# EAGLE board Schaltplan (EAGLE 9.6.2)
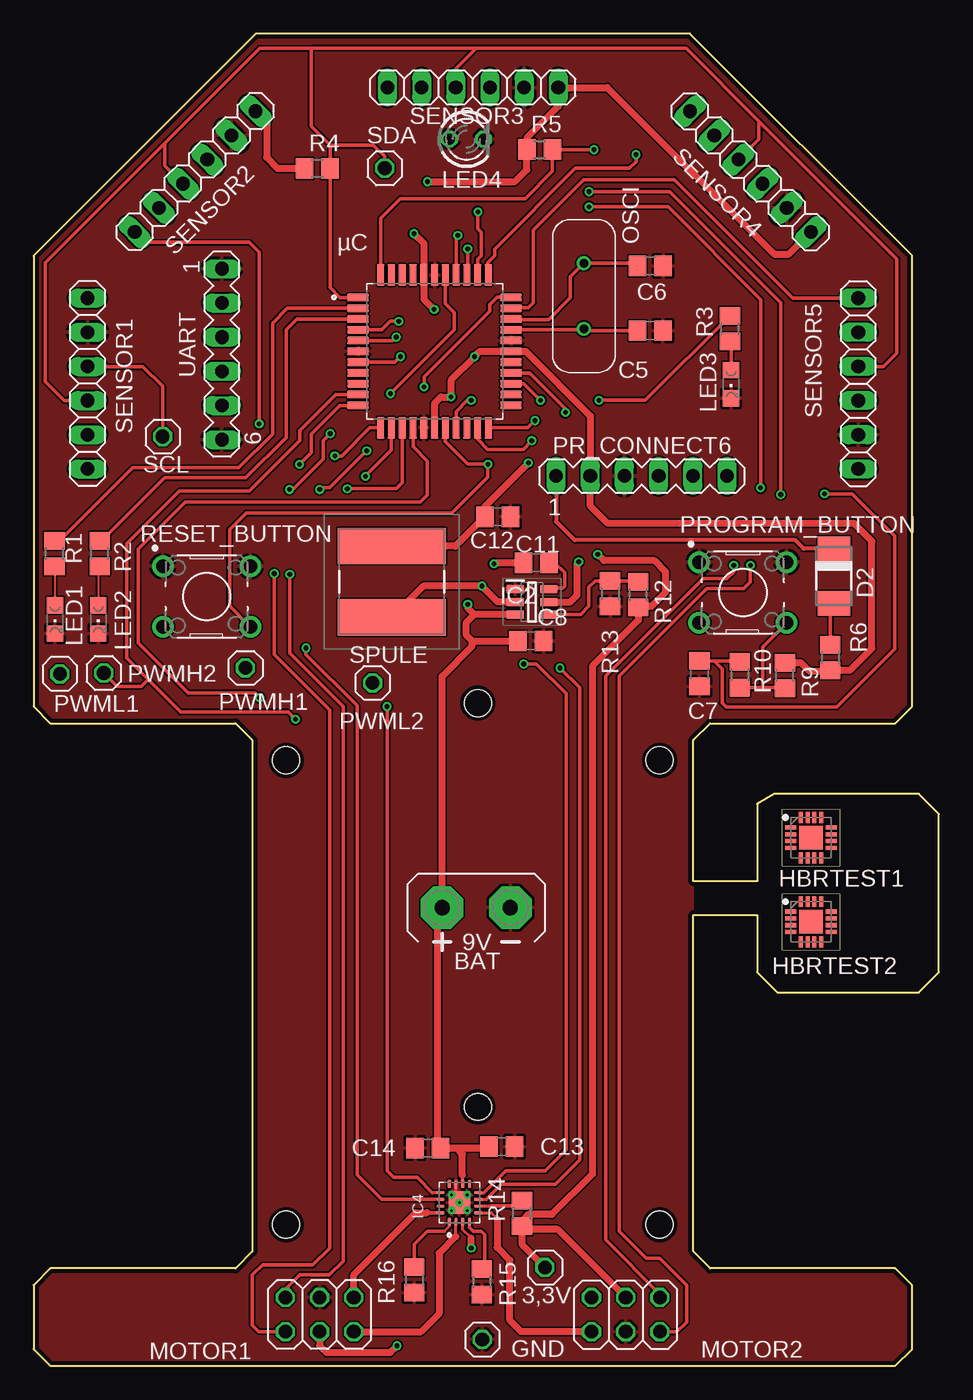
[diagram p0: board, top side]
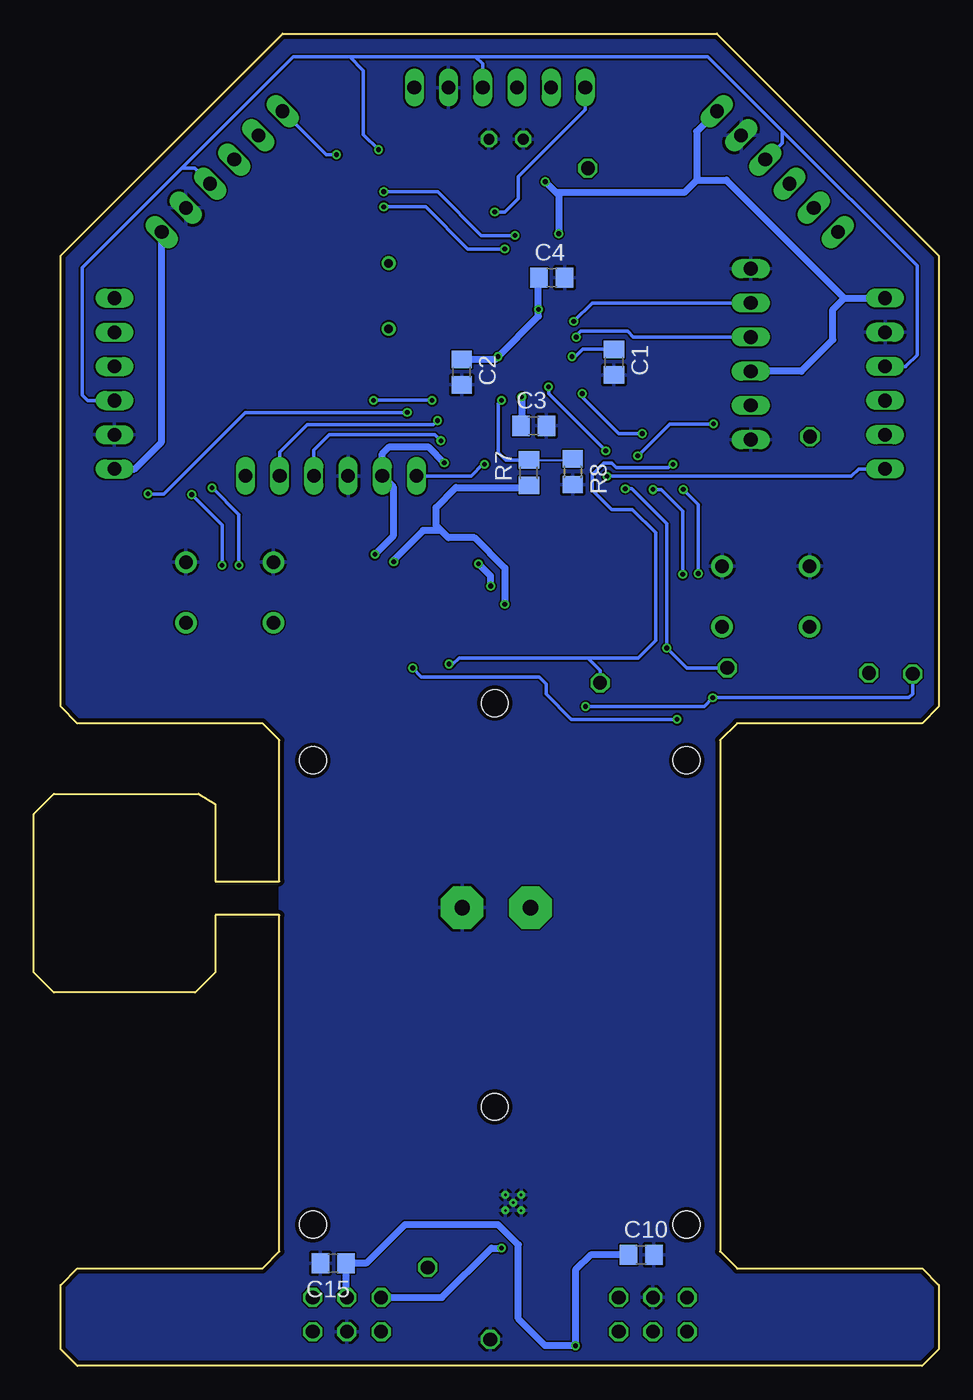
[diagram p1: board, bottom side, seen from below]

Size 67.25 x 99 mm. Coordinates in mm from the lower left corner, seen from the top.
Outline: 16.5,99 0,82.5 0,49 1.25,47.75 15,47.75 16.25,46.5 16.25,8.5 15,7.25 1.25,7.25 0,6 0,1.25 1.25,0 64,0 65.25,1.25 65.25,6 64,7.25 50.25,7.25 49,8.5 49,33.5 53.75,33.5 53.75,29.25 55.25,27.75 65.75,27.75 67.25,29.25 67.25,41 65.75,42.5 55,42.5 53.75,41.75 53.75,36 49,36 49,46.5 50.25,47.75 64,47.75 65.25,49 65.25,82.5 48.75,99 16.5,99
Copper layers (1*16): Top 0.035mm / dielectric 1.5mm / Bottom 0.035mm
Design rules "PCB-POOL Standard": minimum track width 0.125mm, minimum drill 0.2mm, track to track 0.125mm, track to pad 0.125mm, pad to pad 0.125mm, via to via 0.125mm, smd to smd 0.125mm, copper to edge 0.3mm, drill to drill 0.2mm, minimum pad ring 0.2mm, minimum via ring 0.15mm, stop-mask expansion 0.03mm, vias tented up to drill 0mil, thermal gap 0.2mm
Holes 2 mm at 18.75,45 46.5,45 18.75,10.5 46.5,10.5 33,19.25 33,49.25

## Footprints (pad centres in the part's own frame; a part is rotated, then mirrored left to right if it is on the bottom)
1X01 = drill 1.016 octagon: 1 0,0
AB9V = drill 1.118 pad 3.15 octagon: + 0,2.54; - 0,-2.54
C0805 = smd 1.3 x 1.5: 1 -0.95,0; 2 0.95,0
DO-214AC = smd 1.8 x 2.4: A 2.025,0; C -2.025,0
QFN50P300X300X80-17N = smd 0.8 x 0.3: 1 -1.5,0.75; 2 -1.5,0.25; 3 -1.5,-0.25; 4 -1.5,-0.75; 9 1.5,-0.75; 10 1.5,-0.25; 11 1.5,0.25; 12 1.5,0.75 | smd 0.3 x 0.8: 5 -0.75,-1.5; 6 -0.25,-1.5; 7 0.25,-1.5; 8 0.75,-1.5; 13 0.75,1.5; 14 0.25,1.5; 15 -0.25,1.5; 16 -0.75,1.5 | smd 1.75 x 1.75: 17 0,0
SOT95P280X110-6N = smd 1.25 x 0.6: 1 -1.25,0.95; 2 -1.25,0; 3 -1.25,-0.95; 4 1.25,-0.95; 5 1.25,0; 6 1.25,0.95
QFN50P300X300X80-17N' = smd 0.6 x 0.24: 1 -1.4,0.75; 2 -1.4,0.25; 3 -1.4,-0.25; 4 -1.4,-0.75; 9 1.4,-0.75; 10 1.4,-0.25; 11 1.4,0.25; 12 1.4,0.75 | smd 0.24 x 0.6: 5 -0.75,-1.4; 6 -0.25,-1.4; 7 0.25,-1.4; 8 0.75,-1.4; 13 0.75,1.4; 14 0.25,1.4; 15 -0.25,1.4; 16 -0.75,1.4 | smd 1.68 x 1.68: 17 0,0 | drill 0.2 pad 0.3: 18 -0.58,0.58; 19 0.58,0.58; 20 0,0; 21 -0.58,-0.58; 22 0.58,-0.58
CHIPLED_0805 = smd 1.2 x 1.2: A 0,-1.05; C 0,1.05
LED3MM = drill 0.813 octagon: A -1.27,0; K 1.27,0
2X03 = drill 1.016 octagon: 1 -2.54,-1.27; 2 -2.54,1.27; 3 0,-1.27; 4 0,1.27; 5 2.54,-1.27; 6 2.54,1.27
XTAL_ECS-160-20-4X-B-DN = drill 0.63 pad 1.03: 1 -2.44,0; 2 2.44,0
MA06-1 = drill 1.016 long: 1 -6.35,0; 2 -3.81,0; 3 -1.27,0; 4 1.27,0; 5 3.81,0; 6 6.35,0
SW_B3F-1000 = drill 1 pad 1.6: 1 -3.25,2.25; 2 3.25,2.25; 3 -3.25,-2.25; 4 3.25,-2.25
R0805 = smd 1.3 x 1.5: 1 -0.95,0; 2 0.95,0
1X06 = drill 1.016 long: 1 -6.35,0; 2 -3.81,0; 3 -1.27,0; 4 1.27,0; 5 3.81,0; 6 6.35,0
SDR08056R8ML = smd 8 x 2.7: 1 0,-2.65; 2 0,2.65
QFP80P1200X1200X120-44N = smd 1.6 x 0.55: 1 -5.68,4; 2 -5.68,3.2; 3 -5.68,2.4; 4 -5.68,1.6; 5 -5.68,0.8; 6 -5.68,0; 7 -5.68,-0.8; 8 -5.68,-1.6; 9 -5.68,-2.4; 10 -5.68,-3.2; 11 -5.68,-4; 23 5.68,-4; 24 5.68,-3.2; 25 5.68,-2.4; 26 5.68,-1.6; 27 5.68,-0.8; 28 5.68,0; 29 5.68,0.8; 30 5.68,1.6; 31 5.68,2.4; 32 5.68,3.2; 33 5.68,4 | smd 0.55 x 1.6: 12 -4,-5.68; 13 -3.2,-5.68; 14 -2.4,-5.68; 15 -1.6,-5.68; 16 -0.8,-5.68; 17 0,-5.68; 18 0.8,-5.68; 19 1.6,-5.68; 20 2.4,-5.68; 21 3.2,-5.68; 22 4,-5.68; 34 4,5.68; 35 3.2,5.68; 36 2.4,5.68; 37 1.6,5.68; 38 0.8,5.68; 39 0,5.68; 40 -0.8,5.68; 41 -1.6,5.68; 42 -2.4,5.68; 43 -3.2,5.68; 44 -4,5.68

## Placement (x,y rotation side)
3,3V  [1X01]  37.98,7.31 0 top
BAT  AB9V  [AB9V]  32.88,34.05 90 top
C1  10μ  [C0805]  24.14,74.59 270 bottom
C2  0,1 μF  [C0805]  35.46,73.86 270 bottom
C3  0,1 μF  [C0805]  30.11,69.86 0 bottom
C4  0,1 μF  [C0805]  28.76,80.86 0 bottom
C5  15pf  [C0805]  45.8,76.94 180 top
C6  15pf  [C0805]  45.8,81.73 180 top
C7  1 µF  [C0805]  49.46,51.44 270 top
C8  2.2 µF  [C0805]  36.94,53.88 0 top
C10  100 nF  [C0805]  22.12,8.25 0 bottom
C11  0,1 µF  [C0805]  37.32,59.67 0 top
C12  44 µF  [C0805]  34.47,63.1 0 top
C13  10 µF  [C0805]  34.78,16.29 0 top
C14  100 nF  [C0805]  29.28,16.19 0 top
C15  100 nF  [C0805]  45,7.62 180 bottom
D2  [DO-214AC]  59.45,58.7 270 top
GND  [1X01]  33.33,1.96 0 top
HBRTEST1  DRV8411RTER  [QFN50P300X300X80-17N]  57.75,39.25 0 top
HBRTEST2  DRV8411RTER  [QFN50P300X300X80-17N]  57.75,33 0 top
IC2  LMR51420XDDCR  [SOT95P280X110-6N]  37.02,56.77 0 top
IC4  DRV8411RTER  [QFN50P300X300X80-17N']  31.62,12.13 90 top
LED1  [CHIPLED_0805]  1.58,55.48 180 top
LED2  [CHIPLED_0805]  4.8,55.48 180 top
LED3  [CHIPLED_0805]  51.81,72.95 180 top
LED4  TLLR4400  [LED3MM]  32.16,91.17 0 top
MOTOR1  [2X03]  21.24,3.81 180 top
MOTOR2  [2X03]  43.98,3.81 0 top
OSCI  ECS-160-20-4X-B-DN  [XTAL_ECS-160-20-4X-B-DN]  40.88,79.5 90 top
PR_CONNECT  [MA06-1]  45.16,66.13 0 top
PROGRAM_BUTTON  B3F-1000  [SW_B3F-1000]  52.69,57.47 0 top
PWMH1  [1X01]  15.73,51.87 0 top
PWMH2  [1X01]  5.2,51.49 0 top
PWML1  [1X01]  1.95,51.42 0 top
PWML2  [1X01]  25.17,50.76 0 top
R1  680 Ω  [R0805]  1.55,60.38 90 top
R2  680 Ω  [R0805]  4.9,60.38 90 top
R3  680 Ω  [R0805]  51.72,77.08 90 top
R4  10 kΩ  [R0805]  21.08,88.99 0 top
R5  10 kΩ  [R0805]  37.58,90.39 0 top
R6  10 kΩ  [R0805]  59.18,52.64 270 top
R7  20 kΩ  [R0805]  30.46,66.37 90 bottom
R8  10 kΩ  [R0805]  27.21,66.44 270 bottom
R9  10 kΩ  [R0805]  55.81,51.31 90 top
R10  1kΩ  [R0805]  52.46,51.36 270 top
R12  100 kΩ  [R0805]  44.92,57.31 90 top
R13  22,1 kΩ  [R0805]  42.82,57.38 270 top
R14  10 kΩ  [R0805]  36.28,11.34 90 top
R15  1 Ω  [R0805]  33.28,6.24 270 top
R16  1 Ω  [R0805]  28.28,6.39 270 top
RESET_BUTTON  B3F-1000  [SW_B3F-1000]  12.86,57.17 0 top
SCL  [1X01]  9.58,69.05 0 top
SDA  [1X01]  26.08,89 0 top
SENSOR1  [1X06]  4,73 270 top
SENSOR2  [1X06]  12,88.75 225 top
SENSOR3  [1X06]  32.62,95 180 top
SENSOR4  [1X06]  53.25,88.75 135 top
SENSOR5  [1X06]  61.25,73 90 top
SPULE  SDR0805-6R8ML  [SDR08056R8ML]  26.6,58.27 0 top
UART  [MA06-1]  13.98,75.18 270 top
µC  DSPIC33FJ64MC804-I/PT  [QFP80P1200X1200X120-44N]  29.78,75.39 0 top

## Library data of the parts
3,3V GND MOTOR1 MOTOR2 PWMH1 PWMH2 PWML1 PWML2 SCL SDA SENSOR1-SENSOR5 = pinhead
BAT = battery
C1-C8 C10-C15 = rcl; SPICEPREFIX: C
D2 = diode
HBRTEST1 HBRTEST2 = ohne thermal; DESCRIPTION: Motor / Motion / Ignition Controllers & Drivers 1.65-V to 11-V, 4-A, dual H-bridge motor driver with current regulation; HEIGHT: 0.8mm; MANUFACTURER_NAME: Texas Instruments; MANUFACTURER_PART_NUMBER: DRV8411RTER
IC2 = LMR51420XDDCR; ARROW_PART_NUMBER: LMR51420XDDCR; ARROW_PRICE-STOCK: https://www.arrow.com/en/products/lmr51420xddcr/texas-instruments?region=nac; DESCRIPTION: Switching Voltage Regulators SIMPLE SWITCHER power converter 4.5-V to 36-V, 2-A, synchronous buck with 40-uA IQ; HEIGHT: 1.1mm; MANUFACTURER_NAME: Texas Instruments; MANUFACTURER_PART_NUMBER: LMR51420XDDCR; MOUSER_PART_NUMBER: 595-LMR51420XDDCR; MOUSER_PRICE-STOCK: https://www.mouser.co.uk/ProductDetail/Texas-Instruments/LMR51420XDDCR?qs=vvQtp7zwQdN6fBqQU4azxw%3D%3D
IC4 = DRV8411RTER; DESCRIPTION: Motor / Motion / Ignition Controllers & Drivers 1.65-V to 11-V, 4-A, dual H-bridge motor driver with current regulation; HEIGHT: 0.8mm; MANUFACTURER_NAME: Texas Instruments; MANUFACTURER_PART_NUMBER: DRV8411RTER
LED1-LED3 = led
LED4 = led; MF: VISHAY SEMICONDUCTOR; OC_FARNELL: 1612437
OSCI = ECS-160-20-4X-B-DN; AVAILABILITY: In Stock; DESCRIPTION: 16 MHz ±30ppm Crystal 20pF 40 Ohms HC-49/US; MF: ECS Inc.; MP: ECS-160-20-4X-B-DN; PACKAGE: HC-49US ECS Inc.; PRICE: None; PURCHASE-URL: https://pricing.snapeda.com/search/part/ECS-160-20-4X-B-DN/?ref=eda
PR_CONNECT UART = con-lstb; OC_FARNELL: unknown; OC_NEWARK: unknown
PROGRAM_BUTTON RESET_BUTTON = B3F-1000; AVAILABILITY: In Stock; DESCRIPTION: Tactile Switch SPST-NO Top Actuated Through Hole; MF: Omron; MP: B3F-1000; PACKAGE: None; PRICE: None; PURCHASE-URL: https://pricing.snapeda.com/search/part/B3F-1000/?ref=eda
R1-R10 R12-R16 = rcl; SPICEPREFIX: R
SPULE = SDR0805-6R8ML; DESCRIPTION: Bourns SDR0805 Series Wire-wound SMD Inductor with a Ferrite Core, 6.8 uH +/-20% 4.1A Idc Q:30; HEIGHT: 5.3mm; MANUFACTURER_NAME: Bourns; MANUFACTURER_PART_NUMBER: SDR0805-6R8ML; MOUSER_PART_NUMBER: 652-SDR0805-6R8ML; MOUSER_PRICE-STOCK: https://www.mouser.co.uk/ProductDetail/Bourns/SDR0805-6R8ML?qs=uD%2FoUDWqfvRMWomOplYMJg%3D%3D
µC = DSPIC33FJ64MC804-I_PT; AVAILABILITY: In Stock; DESCRIPTION: dsPIC dsPIC™ 33F Microcontroller IC 16-Bit 40 MIPs 64KB (64K x 8) FLASH 44-TQFP (10x10); MF: Microchip; MP: DSPIC33FJ64MC804-I/PT; PACKAGE: TQFP-44 Microchip; PRICE: None; PURCHASE-URL: https://pricing.snapeda.com/search/part/DSPIC33FJ64MC804-I/PT/?ref=eda

## Nets
3,3V: 3,3V.1 C2.1 C3.1 C4.1 C10.1 C12.1 C15.1 MOTOR1.4 MOTOR2.4 PR_CONNECT.2 R4.1 R5.1 R6.2 R9.2 R12.1 R14.1 SENSOR1.1 SENSOR2.1 SENSOR3.1 SENSOR4.1 SENSOR5.1 SPULE.2 UART.4 µC.17 µC.28 µC.40
9V: BAT.+ C8.1 C13.1 C14.2 IC2.3 IC2.5 IC4.10 R7.1
CRY1: C5.2 OSCI.1 µC.30
CRY2: C6.2 OSCI.2 µC.31
GND: BAT.- C1.2 C2.2 C3.2 C4.2 C5.1 C6.1 C7.2 C8.2 C10.2 C12.2 C13.2 C14.1 C15.2 GND.1 IC2.1 IC4.11 IC4.17 IC4.18 IC4.19 IC4.20 IC4.21 IC4.22 LED1.C LED2.C LED3.C LED4.A LED4.K MOTOR1.3 MOTOR2.3 PR_CONNECT.3 PROGRAM_BUTTON.1 PROGRAM_BUTTON.2 R8.2 R13.2 R15.2 R16.2 RESET_BUTTON.1 RESET_BUTTON.2 SENSOR1.2 SENSOR2.2 SENSOR3.2 SENSOR4.2 SENSOR5.2 UART.1 UART.6 µC.6 µC.16 µC.29 µC.39
GPIO0_1: SENSOR1.6 µC.13
GPIO0_2: SENSOR2.6 µC.12
GPIO0_3: SENSOR3.6 µC.35
GPIO0_4: SENSOR4.6 µC.34
GPIO0_5: SENSOR5.6 µC.32
KANAL1_A: MOTOR2.6 µC.36
KANAL1_B: MOTOR2.5 µC.37
KANAL2_A: MOTOR1.6 µC.38
KANAL2_B: MOTOR1.5 µC.33
LED1: R1.2 µC.2
LED2: R2.2 µC.3
LED3: R3.2 µC.25
M1+: IC4.2 MOTOR1.2
M1-: IC4.16 MOTOR1.1
M2+: IC4.3 MOTOR2.2
M2-: IC4.5 MOTOR2.1
MCLR: D2.C PR_CONNECT.1 RESET_BUTTON.4 µC.18
N$1: C1.1 µC.7
N$2: PROGRAM_BUTTON.4 R9.1 R10.2
N$3: LED2.A R2.1
N$4: LED1.A R1.1
N$5: C11.2 IC2.6
N$7: PR_CONNECT.6
N$8: LED3.A R3.1
N$10: D2.A R6.1
N$11: C11.1 IC2.2 SPULE.1
N$12: IC4.6 R14.2
N$13: IC2.4 R12.2 R13.1
N$14: IC4.1 R16.1
N$16: IC4.4 R15.1
PGC1: PR_CONNECT.5 µC.22
PGD1: PR_CONNECT.4 µC.21
PWMH1: IC4.14 PWMH1.1 µC.14
PWMH2: IC4.7 PWMH2.1 µC.10
PWML1: IC4.13 PWML1.1 µC.15
PWML2: IC4.8 PWML2.1 µC.11
SCL: R5.2 SCL.1 SENSOR1.3 SENSOR2.3 SENSOR3.3 SENSOR4.3 SENSOR5.3 µC.44
SDA: R4.2 SDA.1 SENSOR1.4 SENSOR2.4 SENSOR3.4 SENSOR4.4 SENSOR5.4 µC.1
SW1: C7.1 R10.1 µC.26
UART_RX: UART.2 µC.4
UART_TX: UART.3 µC.5
VREF: R7.2 R8.1 µC.19

## Tracks (layer width: path | path; a pad name or v marks a point on that pad's centre or on a via)
3,3V  (via drill 0.35)
  Top 0.254: R14.1 36.28,10.25 | 20,88.99 R4.1
  Top 0.508: 36.28,10.25 36.31,10.28 36.31,8.98 3,3V.1 | µC.17 29.78,71.53 30.25,72 v31,72 31,73.25 v32.75,75 33.14,75.39 µC.28 36.54,75.39 41.35,70.58 PR_CONNECT.2 41.35,63.9 42.65,62.6 60.95,62.6 62.26,61.29 62.26,53.31 60.64,51.69 R6.2 59.14,51.65 57.6,51.65 56.99,52.26 R9.2 | v29.75,78.5 28.98,79.27 µC.40 28.98,83.41 v28.25,84.14 | SENSOR4.1 56.11,82.62 55,82.62 42.62,95 SENSOR3.1 38.98,93.59 36.63,91.25 R5.1 36.63,88.88 35.75,88 v29.25,88 | SENSOR2.1 17.3,92.43 17.3,89.8 18.11,88.99 20,88.99 | v41.9,60.3 42.37,59.83 46.12,59.83 46.95,59 46.95,57.5 45.9,56.45 45.01,56.45 R12.1 44.92,55.42 41.5,52 41.5,14.25 38.5,11.25 36.75,11.25 36.28,10.78 R14.1 36.53,10.14 38.92,10.14 MOTOR2.4 | SPULE.2 31.34,60.92 C12.1 33.52,63.87 v36.75,67.1 | MOTOR1.4 21.25,1.5 21.75,1 26.5,1 v27,1.5
  Bottom 0.152: 31,69.92 C3.1
  Bottom 0.508: C2.1 32.94,74.81 v32.75,75 29.75,78 v29.75,78.5 29.75,80.82 C4.1 | SENSOR5.1 59.75,66.65 57.74,68.66 SENSOR4.1 | v28.25,84.14 28.25,87 v29.25,88 28.44,87.19 18.94,87.19 18,88.12 | SENSOR2.1 18,91.73 18,88.12 | 7.02,79.35 7.88,78.5 7.88,76.25 10.21,73.91 UART.4 | 7.02,79.35 SENSOR1.1 | 18,88.12 15.8,88.12 7.02,79.35 | v31,72 31,69.92 | C10.1 25.88,8.25 27,7.12 v27,1.5 29.25,1.5 31.25,3.5 31.25,9 32.75,10.5 39.67,10.5 42.55,7.62 C15.1 44.05,5.15 MOTOR2.4 | v41.9,60.3 40.55,61.65 40.55,65.33 PR_CONNECT.2 41.35,67.78 40.83,68.3 37.95,68.3 v36.75,67.1
9V  (via drill 0.35)
  Top 0.152: 33.73,16.19 C13.1 | C14.2 29.98,16.44
  Top 0.24: IC4.10 31.87,14
  Top 0.254: 31.87,14 31.87,14.13 31.84,14.16
  Top 0.508: C14.2 31.38,16.19 | 29.98,16.44 29.98,33.69 BAT.+ 30.34,51.24 32.58,53.48 32.58,53.88 | 31.38,16.19 33.73,16.19 | 31.38,16.19 31.84,15.73 31.84,14.16 | v32.25,56.6 32.25,56.3 32.73,55.83 | IC2.5 39.88,56.77 40.35,57.25 40.35,59.6 v40.5,59.75 | IC2.3 32.73,55.83 | 32.73,55.83 32.1,55.2 32.1,54.35 32.58,53.88 | 32.58,53.88 C8.1
  Bottom 0.508: v32.25,56.6 32.25,59.3 34.5,61.55 36.45,61.55 36.98,62.08 | 36.98,62.08 37.35,62.45 37.35,63.8 35.88,65.27 30.61,65.27 R7.1 | 36.98,62.08 38.33,62.08 40.5,59.9 v40.5,59.75
CRY1
  Top 0.254: C5.2 40.99,76.94 OSCI.1 40.8,76.99 µC.30
CRY2
  Top 0.254: µC.31 35.5,77.79 35.54,77.75 38.25,77.75 39.88,79.38 39.88,80.94 OSCI.2 44.65,81.94 C6.2
GND
  Top 0.254: IC4.11 31.37,13.04 IC4.19
  pour Top: 16.5,99 0,82.5 0,49 1.25,47.75 15,47.75 16.25,46.5 16.25,8.5 15,7.25 1.25,7.25 0,6 0,1.25 1.25,0 64,0 65.25,1.25 65.25,6 64,7.25 50.25,7.25 49,8.5 49,46.5 50.25,47.75 64,47.75 65.25,49 65.25,82.5 48.75,99
  pour Bottom: 15,47.75 1.25,47.75 0,49 0,82.5 16.5,99 48.75,99 65.25,82.5 65.25,49 64,47.75 50.25,47.75 49,46.5 49,8.5 50.25,7.25 64,7.25 65.25,6 65.25,1.25 64,0 1.25,0 0,1.25 0,6 1.25,7.25 15,7.25 16.25,8.5 16.25,46.5
GPIO0_1  (via drill 0.35)
  Top 0.254: v24.65,66.1 24.65,66.15 26.56,68.06 26.56,69.69 µC.13
  Bottom 0.254: SENSOR1.6 5.95,66.65 6.5,66.1 v24.65,66.1
GPIO0_2  (via drill 0.35)
  Top 0.254: SENSOR2.6 8.27,83.5 16,83.5 16.75,82.75 v16.75,70 | v22.38,67.62 22.88,67.62 24.96,69.71 µC.12
  Bottom 0.254: v22.38,67.62 20,70 v16.75,70
GPIO0_3  (via drill 0.35)
  Top 0.254: v33,85.75 33,84.5 33.25,84.25 33.25,83.02 33.25,82.52 32.98,82.25 µC.35
  Bottom 0.254: SENSOR3.6 26.27,93.35 31.25,88.38 31.25,86.75 32.25,85.75 v33,85.75
GPIO0_4  (via drill 0.35)
  Top 0.254: v44.75,90 44.75,89.5 44.25,89 40.25,89 34.25,83 34.25,82.5 33.75,82 33.75,81.1 µC.34
  Bottom 0.254: SENSOR4.6 45.52,90 v44.75,90
GPIO0_5
  Top 0.254: µC.32 35.49,78.62 36.75,78.62 37.12,79 37.12,84.4 40.88,88.15 47.6,88.15 56.4,79.35 SENSOR5.6
KANAL1_A  (via drill 0.35)
  Top 0.254: MOTOR2.6 46.52,5.33 42.5,9.35 42.5,51.25 49.75,58.5 51.5,58.5 52,59 v52,59.5 | v54,65.25 54,79.25 47.12,86.13 v41.25,86.13 | v32.25,83 32.25,81.14 µC.36
  Bottom 0.254: v52,59.5 52,63.25 v54,65.25 | v41.25,86.13 38.13,86.13 35,83 v32.25,83
KANAL1_B  (via drill 0.35)
  Top 0.254: MOTOR2.5 47.79,2.54 48.5,3.25 48.5,6 46.5,8 45.5,8 43.5,10 43.5,51.25 50,57.75 52.75,57.75 53.25,58.25 v53.25,59.5 | v55.5,64.75 55.5,79 47.25,87.25 v41.25,87.25 | v31.5,84 31.38,83.88 µC.37
  Bottom 0.254: v53.25,59.5 53.25,62.5 v55.5,64.75 | v41.25,87.25 37.25,87.25 34,84 v31.5,84
KANAL2_A  (via drill 0.35)
  Top 0.254: MOTOR1.6 16.71,2.54 16.25,3 16.25,6.75 17,7.5 20.75,7.5 22,8.75 22,48.75 17.87,52.88 v17.87,58.87 | v19,65.13 19.25,65.13 21.5,67.38 21.5,68.75 v22.03,69.28 | v26.5,72.25 31.25,77 31.25,78.25 30.58,78.92 µC.38
  Bottom 0.254: v17.87,58.87 17.87,64 v19,65.13 | v22.03,69.28 23.78,69.28 26.5,72 v26.5,72.25
KANAL2_B  (via drill 0.35)
  Top 0.254: v19.02,58.82 19.02,52.98 23,49 23,7.78 21.97,6.75 19.75,6.75 18.7,5.71 MOTOR1.5 | µC.33 35.42,79.42 34.42,79.42 33.88,78.88 33.88,78.38 29,73.5 v29,72.75 | v21.25,65.13 21.37,65.25 22,65.25 v24.75,68
  Bottom 0.254: v29,72.75 29,72.25 v24.75,68 | v19.02,58.82 19.02,63.52 20.63,65.13 v21.25,65.13
LED1
  Top 0.152: 18.81,78.56 18.84,78.59 | 24,78.59 µC.2 | 15.25,66.75 15.12,66.75
  Top 0.254: 15.25,66.75 17.75,69.25 17.75,77.5 18.81,78.56 | 18.84,78.59 24,78.59 | 15.12,66.75 7.38,66.75 1.95,61.33 R1.2
LED2
  Top 0.152: 19.5,77.75 19.54,77.79
  Top 0.254: 19.5,77.75 18.75,77 18.75,69 15.75,66 9.75,66 5.07,61.33 R2.2 | 19.54,77.79 µC.3
LED3  (via drill 0.35)
  Top 0.254: R3.2 45.45,71.75 v42,71.75 | v37.65,71.75 36.41,72.99 µC.25
  Bottom 0.254: v42,71.75 v37.65,71.75
M1+
  Top 0.24: 31.37,9.62 IC4.2
  Top 0.508: MOTOR1.2 28.79,2.54 30.12,3.87 30.12,8.37 31.37,9.62
M1-
  Top 0.254: 29.2,11.38 IC4.16
  Top 0.508: 29.2,11.38 28.38,11.38 23.78,6.79 MOTOR1.1
M2+  (via drill 0.35)
  Top 0.24: IC4.3 31.88,10.12 32.5,9.5
  Top 0.508: v32.5,8.75 32.5,9.5
  Bottom 0.508: MOTOR2.2 36.92,5.08 33.25,8.75 v32.5,8.75
M2-
  Top 0.24: IC4.5 34,11.38 34.43,10.95
  Top 0.508: MOTOR2.1 36.21,2.54 35.38,3.38 35.38,7.86 34.43,8.8 34.43,10.95
MCLR  (via drill 0.35)
  Top 0.254: µC.18 30.58,68.67 32.25,67 v33.75,67 33.75,66.05 31.08,63.38 15.78,63.38 14.55,62.15 14.55,56.48 RESET_BUTTON.4
  Top 0.305: PR_CONNECT.1 38.81,62.74 40.2,61.35 56.58,61.35 57.2,60.73 D2.C
  Bottom 0.254: v33.75,67 33.88,67 34.75,66.13 PR_CONNECT.1
N$1  (via drill 0.35)
  Top 0.254: v27.25,75 26.84,74.59 µC.7
  Bottom 0.254: v27.25,75 27,75 26.46,75.54 C1.1
N$2
  Top 0.254: R10.2 54.15,50.41 | 54.15,50.41 55.76,50.41 R9.1 | 54.15,50.41 54.15,53.43 PROGRAM_BUTTON.4
N$3
  Top 0.152: R2.1 4.8,59.33 LED2.A
N$4
  Top 0.152: R1.1 1.58,59.4 LED1.A
N$5
  Top 0.254: C11.2 38.72,59.67 39.45,58.95 39.45,57.95 39.3,57.8 38.35,57.8 IC2.6
N$8
  Top 0.254: LED3.A 51.81,76.05 R3.1
N$10
  Top 0.254: D2.A 59.18,56.41 R6.1
N$11  (via drill 0.35)
  Top 0.508: SPULE.1 28.94,57.95 v33.3,57.95 34.48,56.77 IC2.2 | C11.1 34.27,59.67 v34.2,59.6
  Bottom 0.508: v33.3,57.95 33.3,58.7 v34.2,59.6
N$12
  Top 0.24: IC4.6 34,11.88
  Top 0.254: 34,11.88 35.87,11.88 R14.2
N$13
  Top 0.254: IC2.4 40.62,55.83 41.25,56.45 41.25,57.88 41.7,58.33 R13.1 44.85,58.33 R12.2
N$14
  Top 0.24: IC4.1 30.87,10.37 30.5,10
  Top 0.254: 30.5,10 29.25,10 28.28,9.03 R16.1
N$16
  Top 0.24: IC4.4 32.37,10.29
  Top 0.254: R15.1 33.5,7.41 33.5,9.75 33.24,10.01 32.66,10.01 32.37,10.29
PGC1  (via drill 0.35)
  Top 0.254: v37.25,70.25 36.71,69.71 µC.22
  Bottom 0.254: v37.25,70.25 37.55,69.95 46.92,69.95 48.97,67.91 PR_CONNECT.5
PGD1  (via drill 0.35)
  Top 0.254: v37,68.75 36.36,68.11 33.75,68.11 32.98,68.88 µC.21
  Bottom 0.254: v37,68.75 37.45,69.2 45.3,69.2 46.43,68.07 PR_CONNECT.4
PWMH1  (via drill 0.35)
  Top 0.24: IC4.14 29.75,12.38
  Top 0.254: v20.23,53.35 20.23,52.87 24.04,49.06 24.04,14.21 25.87,12.38 29.75,12.38 | µC.14 27.38,65.63 26.93,65.18 v23.3,65.18
  Bottom 0.254: v23.3,65.18 22.82,65.18 20.23,62.58 v20.23,53.35 18.75,51.87 PWMH1.1
PWMH2  (via drill 0.35)
  Top 0.2: 34.75,13.5 34.69,13.44
  Top 0.24: IC4.7 33.63,12.38
  Top 0.254: µC.10 22.44,72.19 19.75,69.5 19.75,68.75 16,65 10.8,65 6.9,61.1 6.9,52.6 8.5,51 | v19.45,48.05 19.42,48.05 18.9,48.58 10.93,48.58 8.5,51 | 34.75,13.5 38.75,13.5 40.55,15.3 40.55,50.4 v39.1,51.85 | 33.63,12.38 34.69,13.44 | 8.5,51 8,50.5 6.2,50.5 PWMH2.1
  Bottom 0.254: v19.45,48.05 27.3,48.05 29.17,49.92 29.17,50.67 29.7,51.2 38.44,51.2 v39.1,51.85
PWML1  (via drill 0.35)
  Top 0.24: IC4.13 29.62,12.88
  Top 0.254: µC.15 28.18,68.32 29.25,67.25 29.25,64.7 28.73,64.18 11.25,64.18 7.77,60.7 7.77,53.73 11.5,50 16.45,50 v16.8,49.65 | v26.25,49 26.25,14.5 26.75,14 28.5,14 29.62,12.88
  Bottom 0.254: v26.25,49 26.23,49.02 17.43,49.02 v16.8,49.65 2.23,49.65 1.95,49.92 PWML1.1
PWML2  (via drill 0.35)
  Top 0.24: IC4.8 33.45,12.88
  Top 0.254: µC.11 24.09,71.38 22.75,71.38 20.62,69.25 20.62,67.88 v19.75,67 | v36.4,52.15 37.35,52.15 39.55,49.95 39.55,16.05 38,14.5 35.08,14.5 33.45,12.88
  Bottom 0.254: v19.75,67 19.89,67 20.12,66.77 23.97,66.77 24.3,67.1 24.9,67.1 25.75,66.25 25.75,65.09 24.31,63.65 22.77,63.65 21.05,61.92 21.05,53.9 22.35,52.6 26.1,52.6 | v36.4,52.15 36.1,52.15 35.65,52.6 26.1,52.6 | PWML2.1 25.17,51.67 26.1,52.6
SCL  (via drill 0.35)
  Top 0.254: v41.62,90.38 41.61,90.39 R5.2 38.53,88.78 36.5,86.75 27.25,86.75 25.78,85.28 µC.44 | SCL.1 9.58,72.8 8.11,74.27 SENSOR1.3
  Bottom 0.152: 11.94,92.06 11.56,91.69 | 2.48,74.27 2.44,74.31
  Bottom 0.254: SENSOR5.3 63.23,71.73 63.62,72.12 63.62,81.62 56.25,89 | v41.62,90.38 42.75,91.5 42.75,96.25 43.78,97.28 | SENSOR3.3 33.9,96.75 34.43,97.28 | 43.78,97.28 47.97,97.28 56.25,89 | 43.78,97.28 34.43,97.28 | 34.43,97.28 17.16,97.28 11.94,92.06 11.62,91.75 11.62,90.88 12.85,89.65 SENSOR2.3 | 11.56,91.69 1.62,81.75 1.62,75.12 2.44,74.31 | SENSOR1.3 2.48,74.27 | 56.25,89 55.3,89 SENSOR4.3
SDA
  Top 0.152: 9.75,90.88 9.81,90.94
  Top 0.254: SENSOR1.4 2.27,71.73 0.88,73.12 0.88,82 9.75,90.88 9.75,89.2 SENSOR2.4 | 9.81,90.94 16.78,97.91 20.62,97.91 | SENSOR5.4 63.12,74.27 64.12,75.27 64.12,82.25 53.88,92.5 | 32.88,97.91 48.47,97.91 53.88,92.5 | 32.88,97.91 20.62,97.91 | 20.62,97.91 20.62,92.12 22.03,90.72 | 22.03,90.72 25.24,90.72 26.08,89.88 SDA.1 | SENSOR4.4 53.88,91.17 53.88,92.5 | SENSOR3.4 31.35,96.39 32.88,97.91 | 22.03,90.72 R4.2 22.03,80.11 22.75,79.39 µC.1
SW1  (via drill 0.35)
  Top 0.254: v58.75,64.8 60.83,64.8 63.97,61.65 63.97,53.27 59.65,48.95 51.45,48.95 51.15,49.25 51.15,51.79 50.55,52.39 | µC.26 36.84,73.79 39.5,71.12 v39.5,70.85 | C7.1 50.55,52.39 | 50.55,52.39 52.38,52.39 R10.1
  Bottom 0.254: v58.75,64.8 57.58,64.8 51.53,70.85 v39.5,70.85
UART_RX  (via drill 0.35)
  Top 0.254: µC.4 25.87,76.99 26.5,77.62 v27.12,77.62
  Bottom 0.254: v27.12,77.62 25.76,78.99 UART.2
UART_TX  (via drill 0.35)
  Top 0.254: v26.94,76.44 26.69,76.19 µC.5
  Bottom 0.254: UART.3 22.7,76.45 23.12,76.88 26.62,76.88 27,76.5 v26.94,76.44
VREF  (via drill 0.35)
  Top 0.254: µC.19 31.38,70.93 32.2,71.75 v32.5,71.75
  Bottom 0.152: R8.1 27.28,67.32 R7.2
  Bottom 0.254: v32.5,71.75 32.75,71.5 32.75,67.88 32.2,67.32 R7.2